# Altium PCB PCB.PcbDoc
Units mm, origin at the board's own origin, x right, y up, seen from the top; angles counter-clockwise.
Board outline 152.4 x 101.6 mm, 4 copper layers (Top Layer, (GND), (PWR), Bottom Layer), stack 1.369 mm thick; 143 components, 82 nets, 431 pads, 1 vias.
Unrouted connection lines stored in the file: 245.
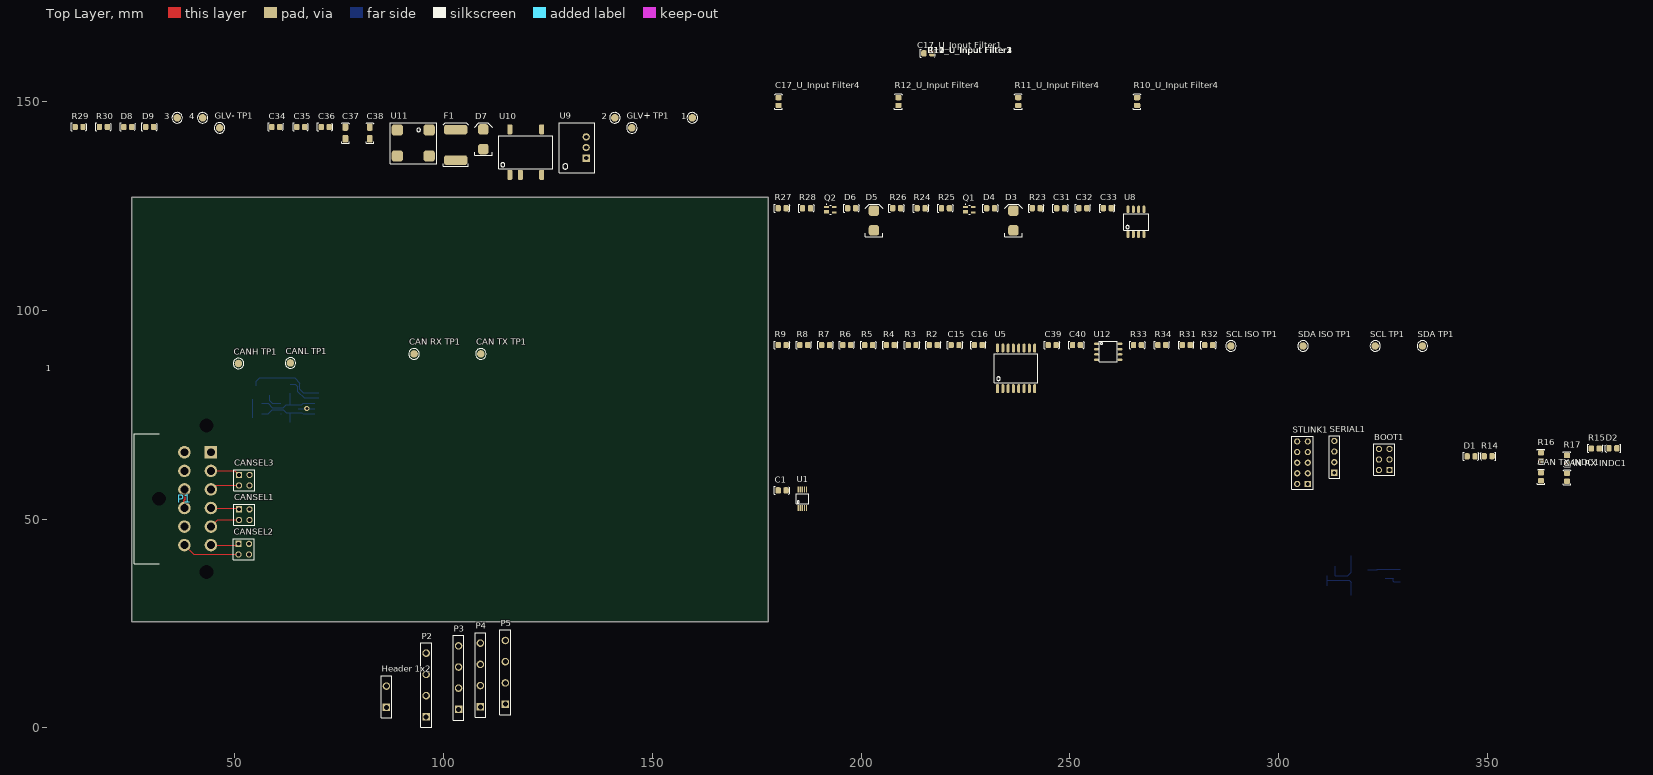
[diagram p0: Top Layer view]
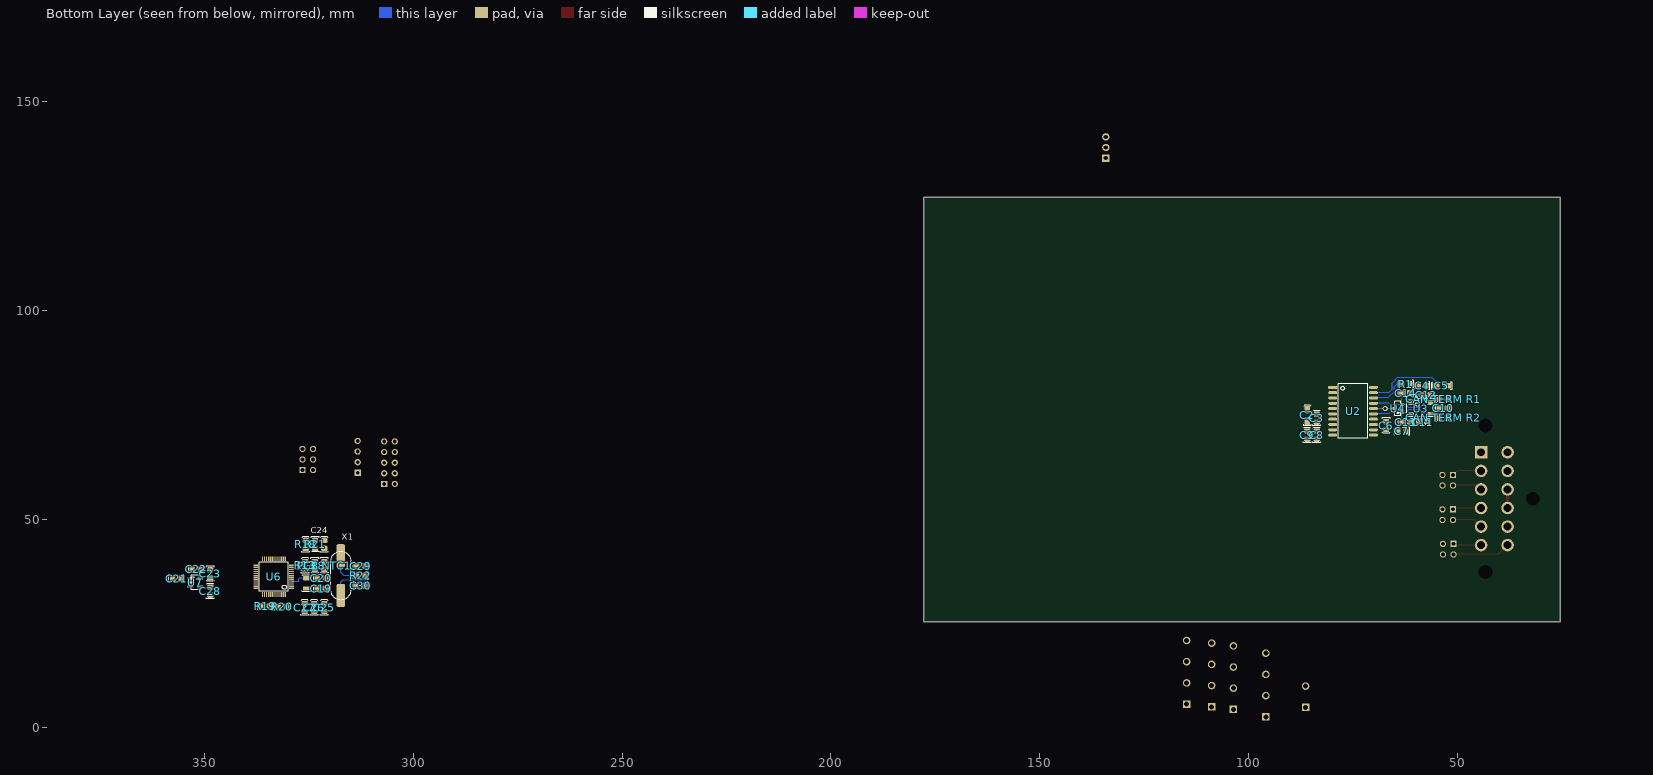
[diagram p1: Bottom Layer view, seen from below]
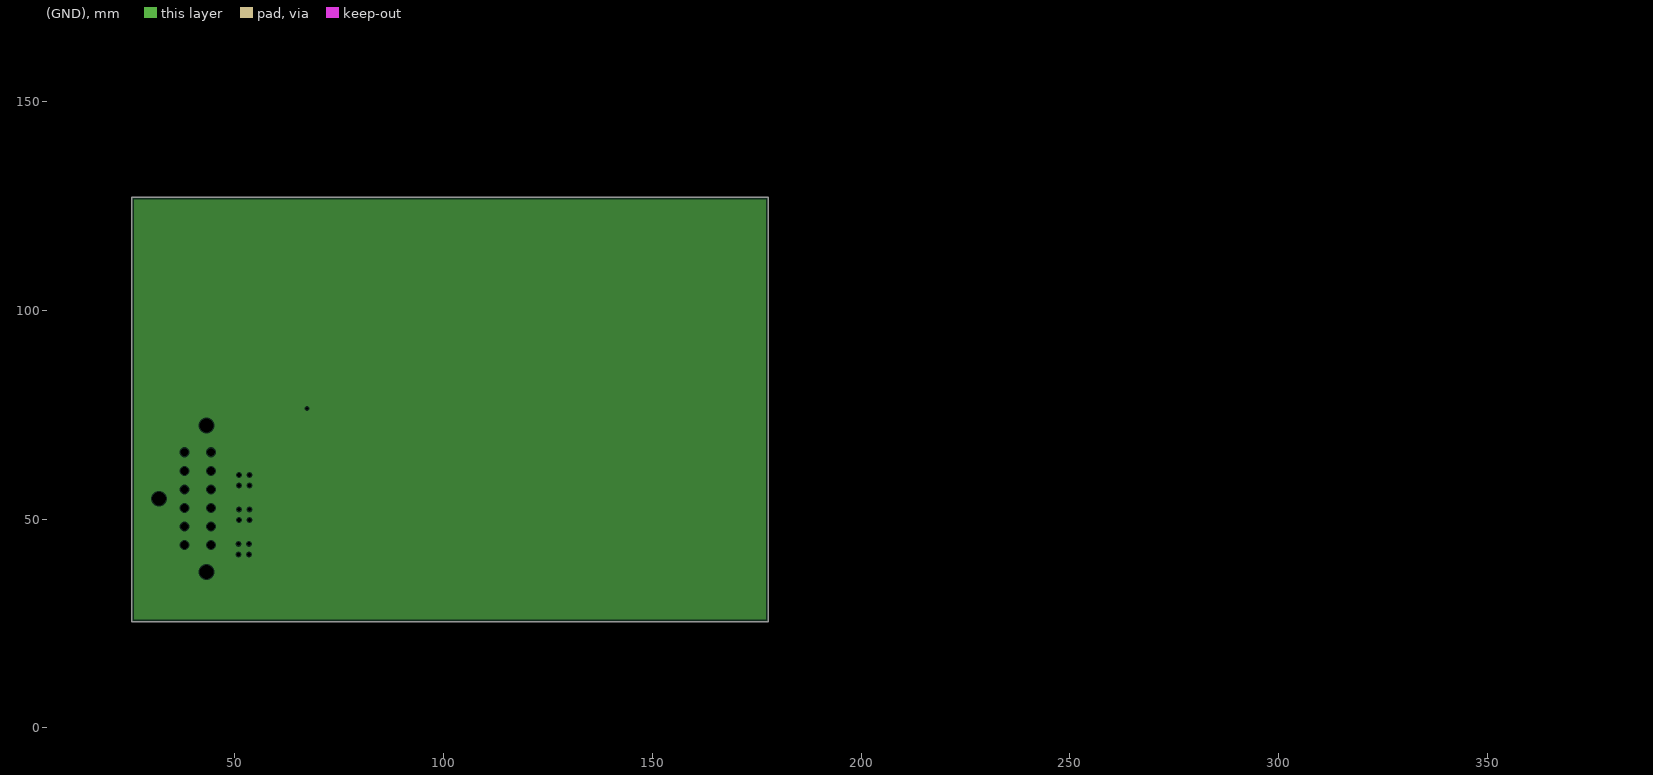
[diagram p2: (GND), clearances drawn from the general rule]
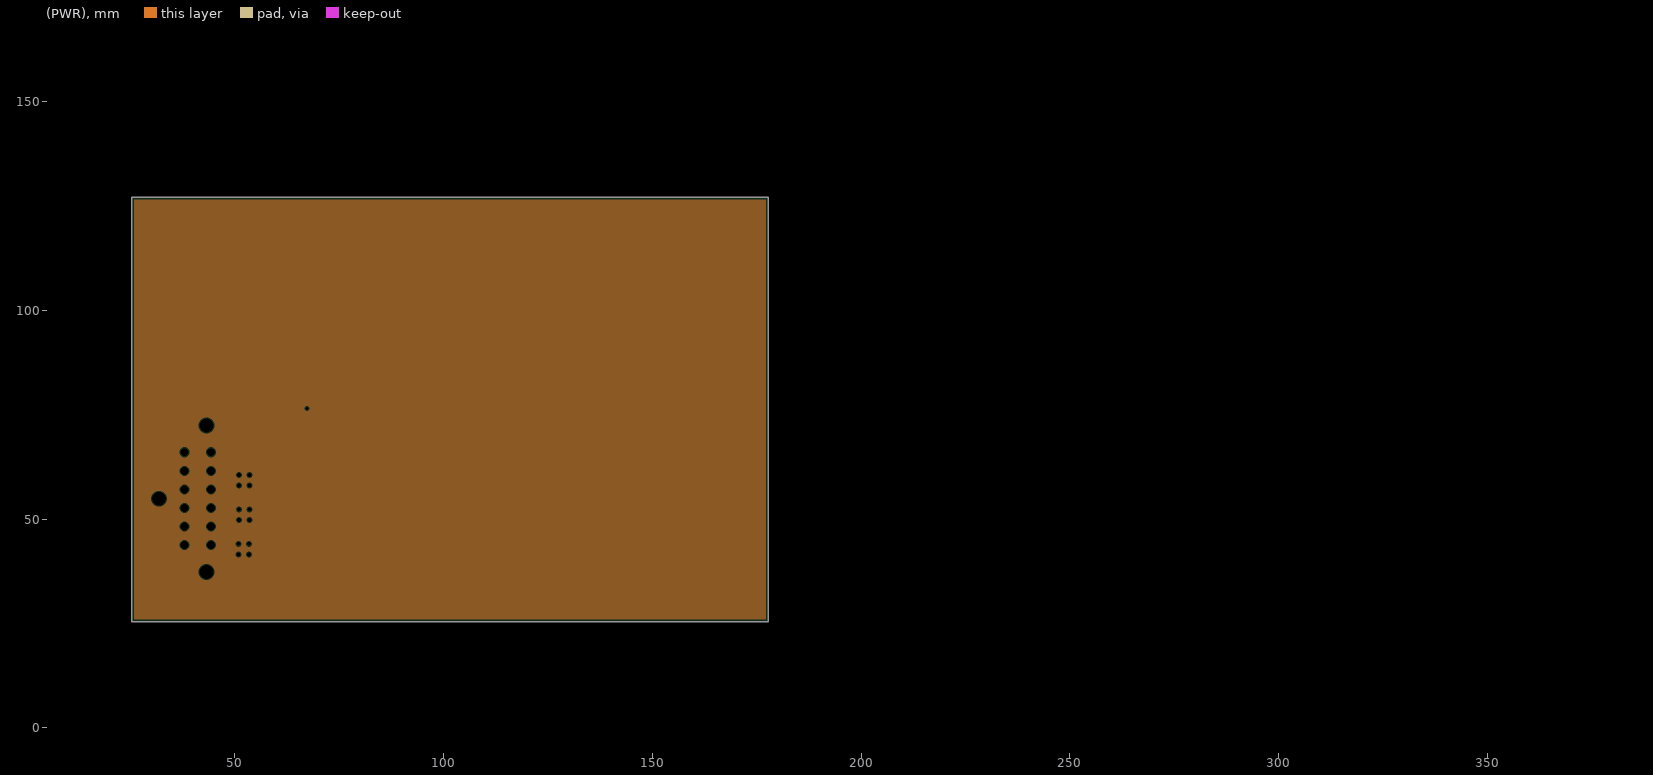
[diagram p3: (PWR), clearances drawn from the general rule]

## Layer stack, top to bottom
Top Solder: solder mask 0.0254, SM-001, Dk 4
Top Layer: signal copper 0.035
Dielectric 1: prepreg 0.1295, PP-017, Dk 4.3
Dielectric 2: prepreg 0.1295, PP-017, Dk 4.3
(GND): plane copper 0.035
Dielectric 3: core 0.7112, Core-039, Dk 4.8
(PWR): plane copper 0.035
Dielectric 4: prepreg 0.1295, PP-017, Dk 4.3
Dielectric 5: prepreg 0.1295, PP-017, Dk 4.3
Bottom Layer: signal copper 0.035
Bottom Solder: solder mask 0.0254, SM-001, Dk 4

## Board outline
25.4,25.4 177.8,25.4 177.8,127 25.4,127

## Design rules (kind name [scope] priority, off if disabled: settings)
Clearance [All] p1: gap=0.254 ignorepadtopadclearanceinfootprint=FALSE except(0: Arc-Hole Track-Hole SMDPad-Hole THPad-Hole Via-Hole Fill-Hole Poly-Hole Region-Hole Text-Hole; 0.1: THPad-THPad; 0.152: Arc-SMDPad Track-SMDPad SMDPad-SMDPad; 0.2: Arc-THPad Track-THPad SMDPad-THPad THPad-Via; 0.203: Arc-Arc Arc-Track Arc-Region Track-Track Track-Region SMDPad-Region THPad-Region Via-Region Fill-Region Poly-Region Region-Region; 0.6: Arc-Poly Track-Poly SMDPad-Poly THPad-Poly Via-Poly Fill-Poly Poly-Poly)
Clearance Clearance_CAN [InNet('CANL') or InNet('CANH')] p2: gap=0.5 ignorepadtopadclearanceinfootprint=FALSE except(0.1: Arc-THPad Arc-Hole Track-THPad Track-Hole SMDPad-THPad SMDPad-Hole THPad-THPad THPad-Hole Via-Hole Fill-Hole Poly-Hole Region-Hole Text-Hole; 0.152: Arc-SMDPad Track-SMDPad SMDPad-SMDPad; 0.2: THPad-Via; 0.203: Arc-Arc Arc-Track Track-Track; 0.254: Arc-Via Arc-Text Track-Via Track-Text SMDPad-Via SMDPad-Text THPad-Text Via-Via Via-Text Fill-Text Poly-Text Region-Text Text-Text) // DiffPair
DiffPairsRouting [InDifferentialPair('CANBUS')] p1: maxlimit=0.254 minlimit=0.254 mostfreqgap=0.254 toplayer_minwidth=0.381 toplayer_maxwidth=0.381 toplayer_prefwidth=0.381 bottomlayer_minwidth=0.381 bottomlayer_maxwidth=0.381 bottomlayer_prefwidth=0.381 maxuncoupledlength=12.7
Height [All] p1: minheight=0 maxheight=50 prefheight=12.7
HoleSize [All] p1: absolutevalues=TRUE maxlimit=10 minlimit=0.025 maxpercent=80.000 minpercent=20.000
MatchedLengths [All] p1: tolerance=25.4 checknetsindiffpair=FALSE checkdiffpairvsdiffpair=TRUE checkxsignals=TRUE checkothers=TRUE
PlaneClearance [All] p1: clearance=0.254
PlaneConnect [All] p1: pad.planeconnectstyle=Relief pad.reliefexpansion=0.508 pad.reliefentries=4 pad.reliefconductorwidth=0.8 pad.reliefairgap=0.254 via.planeconnectstyle=Direct via.reliefexpansion=0.508 via.reliefentries=4 via.reliefconductorwidth=0.8 via.reliefairgap=0.254
PolygonConnect [All] p1: thpad.connectstyle=Relief thpad.reliefconductorwidth=0.6 thpad.reliefentries=4 thpad.polygonreliefangle="90 Angle" thpad.airgapwidth=0.254 smdpad.connectstyle=Relief smdpad.reliefconductorwidth=0.6 smdpad.reliefentries=4 smdpad.polygonreliefangle="90 Angle" smdpad.airgapwidth=0.254 via.connectstyle=Direct via.reliefconductorwidth=0.6 via.reliefentries=4 via.polygonreliefangle="90 Angle" via.airgapwidth=0.254
RoutingVias [All] p1: holewidth=0.711 width=1.27 viastyle="Through Hole" minholewidth=0.203 minwidth=0.254 maxholewidth=0.711 maxwidth=1.27
SolderMaskExpansion [All] p1: expansion=0.051 istentingtop=FALSE
Width [All] p1: maxlimit=3 minlimit=0.127 preferedwidth=0.5
25 further rules are at their usual default settings.

## Classes and differential pairs
channel class "Input Filter": "U_Input Filter1" "U_Input Filter2" "U_Input Filter3" "U_Input Filter4"
component class "U_Power Supply": 1 2 3 4 C34 C35 C36 C37 C38 D7 D8 D9 F1 "GLV+ TP1" "GLV- TP1" R29 R30 U9 U10 U11
component class "U_Output Driver": C31 C32 C33 D3 D4 D5 D6 Q1 Q2 R23 R24 R25 R26 R27 R28 U8
component class U_Microcontroller: BOOT1 C18 C19 C20 C21 C22 C23 C24 C25 C26 C27 C28 C29 C30 "CAN RX INDC1" "CAN TX INDC1" D1 D2 "PCB NTC1" R13 R14 R15 R16 R17 R18 R19 R20 R21 R22 SERIAL1 STLINK1 U6 U7 X1 X2
component class "U_Input Filter4": "C17_U_Input Filter4" "R10_U_Input Filter4" "R11_U_Input Filter4" "R12_U_Input Filter4"
component class "U_Input Filter3": "C17_U_Input Filter3" "R10_U_Input Filter3" "R11_U_Input Filter3" "R12_U_Input Filter3"
component class "U_Input Filter2": "C17_U_Input Filter2" "R10_U_Input Filter2" "R11_U_Input Filter2" "R12_U_Input Filter2"
component class "U_Input Filter1": "C17_U_Input Filter1" "R10_U_Input Filter1" "R11_U_Input Filter1" "R12_U_Input Filter1"
component class "U_Digital Inputs": C15 C16 C39 C40 R2 R3 R4 R5 R6 R7 R8 R9 R31 R32 R33 R34 "SCL ISO TP1" "SCL TP1" "SDA ISO TP1" "SDA TP1" U5 U12
component class U_CAN: C2 C3 C4 C5 C6 C7 C8 C9 C10 C11 C12 C13 C14 "CAN RX TP1" "CAN TERM R1" "CAN TERM R2" "CAN TX TP1" "CANH TP1" "CANL TP1" R1 U2 U3 U4
component class "U_4 Channel ADC": C1 U1
component class "Top Level": CANSEL1 CANSEL2 CANSEL3 "Header 1x2" P1 P2 P3 P4 P5

## Components (designator, comment, footprint, x,y, rotation, side; value= is the part's Value field where it differs from the comment)
1 "0mm" "SMD Test Point" 159.585,146.076 r90 top
2 "0mm" "SMD Test Point" 141.043,146.076 r90 top
3 "0mm" "SMD Test Point" 36.268,146.076 r90 top
4 "0mm" "SMD Test Point" 42.364,146.076 r90 top
BOOT1 "2.54mm" "TH 2.54mm Header 2x3" 326.517,61.722 r90 top
C1 "100nF" 0805 181.102,56.896 r0 top
C2 "10nF" 1206 85.953,76.018 r90 bottom
C3 "100nF" 0805 83.714,74.168 r90 bottom
C4 "100nF" 0805 58.42,81.915 r0 bottom
C5 "10nF" 1206 54.991,81.915 r0 bottom
C6 "10uF" 0805 67.056,72.39 r270 bottom
C7 "100nF" 0805 63.324,70.993 r0 bottom
C8 "10uF" 0805 83.714,70.104 r90 bottom
C9 "100nF" 0805 86,70.104 r90 bottom
C10 "22pF" 0805 53.388,76.473 r0 bottom
C11 "100pF" 0805 58.371,73.146 r0 bottom
C12 "100pF" 0805 57.531,79.629 r0 bottom
C13 "100pF" 0805 62.34,73.146 r0 bottom
C14 "100pF" 0805 62.357,80.137 r0 bottom
C15 "100nF" 0805 222.504,91.694 r0 top
C16 "100nF" 0805 228.092,91.694 r0 top
"C17_U_Input Filter1" "100nF" 0805 216.014,161.531 r0 top (schematic designator C17)
"C17_U_Input Filter2" "100nF" 0805 216.014,161.531 r0 top (schematic designator C17)
"C17_U_Input Filter3" "100nF" 0805 216.014,161.531 r0 top (schematic designator C17)
"C17_U_Input Filter4" "100nF" 0805 180.213,149.987 r90 top (schematic designator C17)
C18 "100nF" 0805 323.557,38.864 r270 bottom
C19 "22pF" 0805 322.072,33.314 r0 bottom
C20 "22pF" 0805 322.072,35.814 r0 bottom
C21 "1uF" 0805 356.665,35.783 r180 bottom
C22 "100nF" 0805 351.917,37.973 r180 bottom
C23 "1uF" 0805 348.589,36.879 r270 bottom
C24 "1uF" 0805 321.31,43.942 r90 bottom
C25 "100nF" 0805 321.31,28.829 r90 bottom
C26 "100nF" 0805 323.723,28.829 r90 bottom
C27 "100nF" 0805 326.009,28.829 r90 bottom
C28 "22uF" 0805 348.615,32.766 r90 bottom
C29 "22pF" 0805 312.577,38.735 r0 bottom
C30 "22pF" 0805 312.528,34.036 r180 bottom
C31 "100nF" 0805 247.777,124.46 r0 top
C32 "100nF" 0805 253.111,124.46 r0 top
C33 "10uF" 0805 258.953,124.46 r0 top
C34 "10uF" 0805 59.89,143.917 r0 top
C35 "10uF" 0805 65.859,143.917 r0 top
C36 "10uF" 0805 71.701,143.917 r0 top
C37 "22uF" 1206 76.527,143.663 r90 top
C38 "22uF" 1206 82.369,143.663 r90 top
C39 "100nF" 0805 245.745,91.694 r0 top
C40 "100nF" 0805 251.587,91.694 r0 top
"CAN RX INDC1" "Blue" "0805 LED" 369.002,60.025 r90 top
"CAN RX TP1" "0mm" "SMD Test Point" 92.964,89.535 r90 top
"CAN TERM R1" "56R" 0805 53.34,78.749 r180 bottom
"CAN TERM R2" "56R" 0805 53.388,74.177 r0 bottom
"CAN TX INDC1" "Blue" "0805 LED" 362.779,60.152 r90 top
"CAN TX TP1" "0mm" "SMD Test Point" 108.966,89.535 r90 top
"CANH TP1" "0mm" "SMD Test Point" 50.927,87.249 r90 top
"CANL TP1" "0mm" "SMD Test Point" 63.373,87.376 r90 top
CANSEL1 "2.54mm" "TH 2.54mm Header 2x2" 51.054,52.324 r270 top
CANSEL2 "2.54mm" "TH 2.54mm Header 2x2" 50.927,44.069 r270 top
CANSEL3 "2.54mm" "TH 2.54mm Header 2x2" 51.054,60.579 r270 top
D1 "Red" "0805 LED" 346.048,65.044 r0 top
D2 "Red" "0805 LED" 380.006,66.922 r180 top
D3 "SD560BTR" "SMB Diode" 236.474,119.38 r90 top
D4 "Orange" "0805 LED" 231.013,124.46 r0 top
D5 "SD560BTR" "SMB Diode" 203.073,119.38 r90 top
D6 "Orange" "0805 LED" 197.739,124.46 r0 top
D7 "SD560BTR" "SMB Diode" 109.547,138.837 r90 top
D8 "Red" "0805 LED" 24.457,143.917 r0 top
D9 "Red" "0805 LED" 29.664,143.917 r0 top
F1 "0ZCF0100AF2A" 2920 102.943,135.916 r90 top
"GLV+ TP1" "0mm" "SMD Test Point" 145.107,143.663 r90 top
"GLV- TP1" "0mm" "SMD Test Point" 46.428,143.663 r90 top
"Header 1x2" "2.54mm" "TH 5.08mm Header 1x2" 86.36,4.926 r90 top
P1 "DT13-12P" DT13-12P 37.977,65.999 r270 top
P2 "2.54mm" "TH 5.08mm Header 1x4" 95.885,2.64 r90 top
P3 "2.54mm" "TH 5.08mm Header 1x4" 103.632,4.418 r90 top
P4 "2.54mm" "TH 5.08mm Header 1x4" 108.839,5.053 r90 top
P5 "2.54mm" "TH 5.08mm Header 1x4" 114.808,5.688 r90 top
"PCB NTC1" "10K (NTC) (B25/85 3430K)" 0805 321.271,38.864 r270 bottom
Q1 "STD70N10F4" SOT-343_N 225.933,124.079 r0 top
Q2 "STD70N10F4" SOT-343_N 192.659,124.079 r0 top
R1 "0R" 0805 62.357,82.296 r0 bottom
R2 "10k" 0805 217.297,91.694 r0 top
R3 "10k" 0805 212.217,91.694 r0 top
R4 "10k" 0805 207.01,91.694 r0 top
R5 "10k" 0805 201.803,91.694 r0 top
R6 "10k" 0805 196.596,91.694 r0 top
R7 "10k" 0805 191.516,91.694 r0 top
R8 "10k" 0805 186.309,91.694 r0 top
R9 "10k" 0805 181.102,91.694 r0 top
"R10_U_Input Filter1" "10k" 0805 216.014,161.531 r0 top (schematic designator R10)
"R10_U_Input Filter2" "10k" 0805 216.014,161.531 r0 top (schematic designator R10)
"R10_U_Input Filter3" "10k" 0805 216.014,161.531 r0 top (schematic designator R10)
"R10_U_Input Filter4" "10k" 0805 266.065,149.987 r90 top (schematic designator R10)
"R11_U_Input Filter1" "1k" 0805 216.014,161.531 r0 top (schematic designator R11)
"R11_U_Input Filter2" "1k" 0805 216.014,161.531 r0 top (schematic designator R11)
"R11_U_Input Filter3" "1k" 0805 216.014,161.531 r0 top (schematic designator R11)
"R11_U_Input Filter4" "1k" 0805 237.617,149.987 r90 top (schematic designator R11)
"R12_U_Input Filter1" "10k" 0805 216.014,161.531 r0 top (schematic designator R12)
"R12_U_Input Filter2" "10k" 0805 216.014,161.531 r0 top (schematic designator R12)
"R12_U_Input Filter3" "10k" 0805 216.014,161.531 r0 top (schematic designator R12)
"R12_U_Input Filter4" "10k" 0805 208.915,149.987 r90 top (schematic designator R12)
R13 "10k" 0805 325.882,38.913 r90 bottom
R14 "510R" 0805 350.112,65.044 r180 top
R15 "510R" 0805 375.808,66.943 r0 top
R16 "680R" 0805 362.812,64.917 r270 top
R17 "680R" 0805 369.035,64.282 r270 top
R18 "10k" 0805 325.755,43.942 r90 bottom
R19 "5.1k" 0805 335.407,29.083 r0 bottom
R20 "5.1k" 0805 331.343,29.083 r180 bottom
R21 "10k" 0805 323.469,43.942 r270 bottom
R22 "10M" 0805 312.577,36.449 r0 bottom
R23 "1.5k" 0805 241.935,124.46 r0 top
R24 "10k" 0805 214.376,124.46 r0 top
R25 "20k" 0805 220.218,124.46 r0 top
R26 "1.5k" 0805 208.534,124.46 r0 top
R27 "10k" 0805 181.102,124.46 r0 top
R28 "20k" 0805 186.944,124.46 r0 top
R29 "680R" 0805 12.773,143.917 r0 top
R30 "510R" 0805 18.615,143.917 r0 top
R31 "3.3k" 0805 277.876,91.694 r0 top
R32 "3.3k" 0805 283.21,91.694 r0 top
R33 "3.3k" 0805 266.192,91.694 r0 top
R34 "3.3k" 0805 272.034,91.694 r0 top
"SCL ISO TP1" "0mm" "SMD Test Point" 288.544,91.44 r90 top
"SCL TP1" "0mm" "SMD Test Point" 323.088,91.44 r90 top
"SDA ISO TP1" "0mm" "SMD Test Point" 305.816,91.44 r90 top
"SDA TP1" "0mm" "SMD Test Point" 334.391,91.44 r90 top
SERIAL1 "2.54mm" "TH 2.54mm Header 1x4" 313.309,61.087 r90 top
STLINK1 "2.54mm" "TH 2.54mm Header 2x5" 306.959,58.42 r90 top
U1 "ADS1115" "TI 10-VSSOP" 185.928,54.864 r90 top
U2 "ADM3053" "AD SOIC-W 20" 74.98,75.819 r270 bottom
U3 "B82787C0104H002" "TDK 4-PC Pad" 61.087,77.713 r180 bottom
U4 "NUP2105L" "ON SOT-23" 64.262,76.463 r90 bottom
U5 "ADuM1400" "AD 16-SOIC" 238.379,86.106 r0 top
U6 "STM32F103C8T6" "STM 48-LQFP" 333.371,36.195 r90 bottom
U7 "RT9193-33GB" "RICHTEK SOT-23-5" 352.394,34.757 r270 bottom
U8 "ADUM3221ARZ" "AD 8-SOIC" 265.811,121.158 r0 top
U9 "R-78C5.0-1.0" "RECOM 3-SIP" 134.185,136.424 r90 top
U10 "R2S-0505/HP" "RECOM 8-SMD (5 Pin)" 119.707,137.821 r0 top
U11 "744272121" "Wurth 4-PC Pad" 88.973,136.932 r0 top
U12 "ISO1540DR" "TI 8-SOIC" 266.065,89.408 r0 top
X1 "8MHz" "Abracon HC-49/US" 317.346,36.46 r270 bottom
X2 "32.768kHz" "EPSON 2-SMD" 325.553,34.59 r90 bottom

## Footprints (in the part's own frame and the unit in brackets; to place one, negate y for a bottom-side part, rotate by r counter-clockwise, add the part's x,y. Pads: shape width x height; smd on the part's side, far side on the other; paste and mask are expansions set on the pad)
0805 [mm]
  rrect50% 1.3x1.5 smd: 1(-0.962,-0.026) 2(0.938,-0.026)
  silkscreen extent -1.85,-0.95 1.8,0.93, body extent -1,-0.65 1,0.66, height 0.73
"0805 LED" [mm]
  rrect50% 1.3x1.5 smd: A(-0.962,-0.026) K(0.938,-0.026)
  silkscreen extent -1.85,-0.95 1.8,0.93, body extent -1.1,-0.62 0.9,0.62, height 1
1206 [mm]
  rrect50% 1.8x1.4 smd: 1(-2.6,0) 2(0.2,0)
  silkscreen extent -3.7,-0.9 1.2,0.9, body extent -2.9,-0.9 0.5,0.9, height 1.85
2920 [mm]
  rrect50% 2.3x5.6 smd: 1(0,0) 2(7.3,0)
  silkscreen extent -1.4,-3 9,3, body extent -0.34,-2.81 7.64,2.81, height 1.14
"Abracon HC-49/US" [mm]
  rrect50% 5.6x2.1 smd: 1(-4.75,0) 2(4.75,0)
  silkscreen extent -5.85,-2.35 5.85,2.35, body extent -6.35,-2.35 6.35,2.35, height 4.06
"AD 8-SOIC" [mm]
  oval 0.7x1.8 smd: 1(-1.905,-3) 2(-0.635,-3) 3(0.635,-3) 4(1.905,-3) 5(1.905,3) 6(0.635,3) 7(-0.635,3) 8(-1.905,3)
  silkscreen extent -2.87,-2 3.05,2, body extent -2.5,-3.1 2.5,3.1, height 1.76
"AD 16-SOIC" [mil]
  rrect50% 28x85 smd: 1(-225,-192.02)
  oval 28x85 smd: 2(-175,-192.02) 3(-125,-192.02) 4(-75,-192.02) 5(-25,-192.02) 6(25,-192.02) 7(75,-192.02) 8(125,-192.02) 9(125,190) 10(75,189.96) 11(25,189.96) 12(-25,189.96) 13(-75,189.96) 14(-125,189.96) 15(-175,191.98) 16(-225,191.98)
  silkscreen extent -257,-138 155,138, body extent -256,-209 156,209, height 104
"AD SOIC-W 20" [mil]
  rrect50% 28x85 smd: 1(-225,-192.02)
  oval 28x85 smd: 2(-175,-192.02) 3(-125,-192.02) 4(-75,-192.02) 5(-25,-192.02) 6(25,-192.02) 7(75,-192.02) 8(125,-192.02) 9(175,-192.02) 10(225,-192.02) 11(225,192.02) 12(175,191.98) 13(125,191.98) 14(75,191.98) 15(25,191.98) 16(-25,191.98) 17(-75,191.98) 18(-125,191.98) 19(-175,191.98) 20(-225,191.98)
  silkscreen extent -257,-138 256,138, body extent -260,-210 260,210, height 105
DT13-12P [mm]
  round 3 hole 3.3 unplated: 0(-6.405,5.33) 0(11.135,-6.1) 0(28.675,5.33)
  rect 3x3 hole 1.9: 1(0,6.35)
  round 3 hole 1.9: 2(4.45,6.35) 3(8.9,6.35) 4(13.35,6.35) 5(17.8,6.35) 6(22.25,6.35) 7(22.25,0) 8(17.8,0) 9(13.35,0) 10(8.9,0) 11(4.45,0) 12(0,0)
  silkscreen extent -4.45,-12 26.7,-6, body extent -18.6,-34.7 40.6,9.5, height 37.63
"EPSON 2-SMD" [mm]
  rrect50% 1x1.8 smd: 1(-1.25,0) 2(1.25,0)
  silkscreen extent -2,-1.2 2,1.2, body extent -1.5,-1 1.5,1, height 1
"ON SOT-23" [mm] "NUP2105L"
  rrect50% 0.8x0.9 smd: 1(-0.95,-1) 2(0.95,-1) 3(0,1)
  silkscreen extent -1.75,-0.65 1.75,0.75, body extent -1.5,-1.28 1.5,1.27, height 1
"RECOM 3-SIP" [mm] "12 to 42 Vdc In, 9 Vdc Out"
  rect 1.75x1.75 hole 1: 1(0,0)
  round 1.75 hole 1: 2(2.54,0) 3(5.08,0)
  silkscreen extent -3.5,-2 8.5,6.5, body extent -3.26,-2.02 8.34,6.48, height 11.41
"RECOM 8-SMD (5 Pin)" [mm]
  rrect50% 1.2x2.4 smd: 1(-3.81,-5.4) 2(-1.27,-5.4) 4(3.81,-5.4) 5(3.81,5.5) 8(-3.81,5.5)
  silkscreen extent -6.5,-4 6.5,4, body extent -6.37,-5.55 6.38,5.55, height 9.2
"RICHTEK SOT-23-5" [mil]
  rrect50% 19x58 smd: 1(-39.37,-39.37) 2(-1.97,-39.37) 3(35.43,-39.37) 4(35.43,53.63) 5(-39.37,53.63)
  silkscreen extent -69,-31 64,46, body extent -62,-51 58,67, height 57
"SMB Diode" [mm]
  rrect50% 2.5x2.5 smd: A(-0.25,0) K(4.45,0)
  silkscreen extent -1.75,-2.1 6,2.1, body extent -0.69,-1.97 4.9,1.97, height 2.5
"SMD Test Point" [mm]
  round 1.8 smd: 1(0,0)
  silkscreen extent -1.27,-1.27 1.27,1.27
SOT-343_N [mm] "SOT343, 4-Leads, Body 2x1.3 mm, Pitch 1.3mm, Lead Span 2.1mm, IPC Medium Density"
  rect 1.15x0.5 smd: 1(-0.925,0.65) 3(0.925,-0.65) 4(0.925,0.65)
  rect 1.15x0.8 smd: 2(-0.925,-0.5)
  silkscreen extent -0.97,-1.1 0.2,1.35, body extent -0.7,-1.1 0.7,1.1, height 1
"STM 48-LQFP" [mm]
  rrect50% 0.3x1.2 smd mask+0.05: 1(-2.75,-4.25) 2(-2.25,-4.25) 3(-1.75,-4.25) 4(-1.25,-4.25) 5(-0.75,-4.25) 6(-0.25,-4.25) 7(0.25,-4.25) 8(0.75,-4.25) 9(1.25,-4.25) 10(1.75,-4.25) 11(2.25,-4.25) 12(2.75,-4.25) 25(2.75,4.25) 26(2.25,4.25) 27(1.75,4.25) 28(1.25,4.25) 29(0.75,4.25) 30(0.25,4.25) 31(-0.25,4.25) 32(-0.75,4.25) 33(-1.25,4.25) 34(-1.75,4.25) 35(-2.25,4.25) 36(-2.75,4.25)
  rrect50% 1.2x0.3 smd mask+0.05: 13(4.25,-2.75) 14(4.25,-2.25) 15(4.25,-1.75) 16(4.25,-1.25) 17(4.25,-0.75) 18(4.25,-0.25) 19(4.25,0.25) 20(4.25,0.75) 21(4.25,1.25) 22(4.25,1.75) 23(4.25,2.25) 24(4.25,2.75) 37(-4.25,2.75) 38(-4.25,2.25) 39(-4.25,1.75) 40(-4.25,1.25) 41(-4.25,0.75) 42(-4.25,0.25) 43(-4.25,-0.25) 44(-4.25,-0.75) 45(-4.25,-1.25) 46(-4.25,-1.75) 47(-4.25,-2.25) 48(-4.25,-2.75)
  silkscreen extent -3.5,-3.5 3.5,3.5, body extent -4.6,-4.6 4.6,4.6, height 1.6
"TDK 4-PC Pad" [mm]
  rrect50% 1.35x0.9 smd: 1(0,0) 2(0,-2.5) 3(4.55,-2.5) 4(4.55,0)
  silkscreen extent -1,-3.2 5.5,0.7, body extent -0.02,-2.82 4.48,0.38, height 2.8
"TH 2.54mm Header 1x4" [mm]
  rect 1.5x1.5 hole 0.9: 1(0,0)
  round 1.5 hole 0.9: 2(2.54,0) 3(5.08,0) 4(7.62,0)
  silkscreen extent -1.27,-1.27 8.89,1.27
"TH 2.54mm Header 2x2" [mm]
  rect 1.5x1.5 hole 0.9: 1(0,0)
  round 1.5 hole 0.9: 2(0,2.54) 3(2.54,0) 4(2.54,2.54)
  silkscreen extent -1.27,-1.27 3.81,3.81
"TH 2.54mm Header 2x3" [mm]
  rect 1.5x1.5 hole 0.9: 1(0,0)
  round 1.5 hole 0.9: 2(0,2.54) 3(2.54,0) 4(2.54,2.54) 5(5.08,0) 6(5.08,2.54)
  silkscreen extent -1.27,-1.27 6.35,3.81
"TH 2.54mm Header 2x5" [mm]
  rect 1.5x1.5 hole 0.9: 1(0,0)
  round 1.5 hole 0.9: 2(0,2.54) 3(2.54,0) 4(2.54,2.54) 5(5.08,0) 6(5.08,2.54) 7(7.62,0) 8(7.62,2.54) 9(10.16,0) 10(10.16,2.54)
  silkscreen extent -1.27,-1.27 11.43,3.81
"TH 5.08mm Header 1x2" [mm]
  rect 1.8x1.8 hole 1.2: 1(0,0)
  round 1.8 hole 1.2: 2(5.08,0)
  silkscreen extent -2.54,-1.27 7.62,1.27
"TH 5.08mm Header 1x4" [mm]
  rect 1.8x1.8 hole 1.2: 1(0,0)
  round 1.5 hole 0.9: 2(5.08,0)
  round 1.8 hole 1.2: 2(5.08,0) 3(10.16,0) 4(15.24,0)
  silkscreen extent -2.54,-1.27 17.78,1.27
"TI 8-SOIC" [mm]
  oval 1.2x0.6 smd: 1(-9.677,2.54) 2(-9.677,1.27) 3(-9.677,0) 4(-9.677,-1.27) 5(-4.089,-1.27) 6(-4.089,0) 7(-4.089,1.27) 8(-4.089,2.54)
  silkscreen extent -9,-1.78 -4.75,3.17, body extent -9.96,-1.87 -3.76,3.14, height 1.76
"TI 10-VSSOP" [mm]
  rrect50% 1.45x0.3 smd mask+0.05: 1(-2.2,1) 2(-2.2,0.5) 3(-2.2,0) 4(-2.2,-0.5) 5(-2.2,-1) 6(2.2,-1) 7(2.2,-0.5) 8(2.2,0) 9(2.2,0.5) 10(2.2,1)
  silkscreen extent -1.25,-1.5 1.25,1.5, body extent -2.45,-1.5 2.45,1.5, height 1.12
"Wurth 4-PC Pad" [mm]
  rrect50% 2.7x2.7 smd: 1(7.62,6.22) 2(0,6.22) 3(0,0) 4(7.62,0)
  silkscreen extent -1.7,-1.8 9.4,8, body extent -1.19,-1.24 8.81,7.46, height 6.2

## Part data
1 2 3 4 "CAN RX TP1" "CAN TX TP1" "CANH TP1" "CANL TP1" "GLV+ TP1" "GLV- TP1" "SCL ISO TP1" "SCL TP1" "SDA ISO TP1" "SDA TP1": library part "SMD Test Point", Angle=0, Contact=NA, Flange=No, Part Number="SMD Test Point", Pitch=0mm, Positions=1, Row Spacing=0
BOOT1: library part "TH 2.54mm Header 2x3", Angle=0, Contact=NA, Flange=No, Part Number="TH 2.54mm Header 2x3", Pitch=2.54mm, Positions=6, Row Spacing=2.54mm
C1 C3 C4 C7 C9 C15 C16 "C17_U_Input Filter1" "C17_U_Input Filter2" "C17_U_Input Filter3" "C17_U_Input Filter4" C18 C22 C25 C26 C27 C31 C32 C39 C40: library part GCM21BR71E104KA37L, Manufacturer=muRata, Rated Voltage=25V, Tolerance=10%, Material=X7R, Part Number=GCM21BR71E104KA37L
C2 C5: library part GCM3195C2A103JA16D, Digikey Part Number=490-4978-2-ND, Manufacturer=muRata, Rated Voltage=100V, Tolerance=5%, Material=Ceramic, Part Number=GCM3195C2A103JA16D
C6 C8 C33 C34 C35 C36: library part GRM21BR6YA106KE43L, Digikey Part Number=490-10514-6-ND, Manufacturer=muRata, Rated Voltage=50V, Tolerance=10%, Material=X5R, Part Number=GRM21BR6YA106KE43L
C10 C19 C20 C29 C30: library part GCM21B5C1H220JA37L, Manufacturer=muRata, Rated Voltage=50V, Tolerance=5%, Material=C0G, Part Number=GCM21B5C1H220JA37L
C11 C12 C13 C14: library part GCM21B5C1H101JA37L, Manufacturer=muRata, Rated Voltage=50V, Tolerance=5%, Material=C0G, Part Number=GCM21B5C1H101JA37L
C21 C23 C24: library part AC0805KKX7R8BB105, Manufacturer=YAGEO, Rated Voltage=25V, Tolerance=10%, Material=X7R, Part Number=AC0805KKX7R8BB105
C28: library part GRM21BR61A226ME51L, Digikey Part Number=490-10511-1-ND, Manufacturer=muRata, Rated Voltage=10V, Tolerance=20%, Material=X5R, Part Number=GRM21BR61A226ME51L
C37 C38: library part CC1206MKX5R7BB226, Digikey Part Number=311-1997-2-ND, Manufacturer=YAGEO, Rated Voltage=16V, Tolerance=20%, Material=Ceramic, Part Number=CC1206MKX5R7BB226
"CAN RX INDC1" "CAN TX INDC1": library part SML-MN2BCTT86C, "LED BLUE CLEAR 2012 SMD", Digikey Part Number=846-1207-1-ND, Manufacturer="ROHM Semiconductor", Colour=Blue, Digikey Link=https://www.digikey.com/product-detail/en/rohm-semiconductor/SMLMN2BCTT86C/846-1207-1-ND/6057239, Part Number=SML-MN2BCTT86C
"CAN TERM R1" "CAN TERM R2": library part RC0805FR0756RL, Digikey Part Number=311-56.0CRCT-ND, Manufacturer=YAGEO, Rated Voltage=0.125W, Tolerance=0.01, Material=FR-07, Part Number=RC0805FR0756RL
CANSEL1 CANSEL2 CANSEL3: library part "TH 2.54mm Header 2x2", Angle=0, Contact=NA, Flange=No, Part Number="TH 2.54mm Header 2x2", Pitch=2.54mm, Positions=4, Row Spacing=2.54mm
D1 D2 D8 D9: library part SML-210LTT86, "Red LED Indication - Discrete 1.75V 0805 (2012 Metric)", Digikey Part Number=511-1286-1-ND, Manufacturer="ROHM Semiconductor", Colour=Red, Digikey Link=https://www.digikey.com/product-detail/en/rohm-semiconductor/SML-210LTT86/511-1286-1-ND/637099, Part Number=SML-210LTT86
D3 D5 D7: "1.2V_F 600V 5A SMB", Digikey Part Number=1655-1530-2-ND, Manufacturer="SMC Diode Solutions", Digikey Link=https://www.digikey.com/product-detail/en/smc-diode-solutions/SD560BTR/1655-1530-2-ND/6022620, Part Number=SD560BTR
D4 D6: library part SML-211DTT86, "Orange LED Indication - Discrete 1.75V 0805 (2012 Metric)", Digikey Part Number=511-1291-1-ND, Manufacturer="ROHM Semiconductor", Colour=Orange, Digikey Link=https://www.digikey.com/product-detail/en/rohm-semiconductor/SML-211DTT86/511-1291-1-ND/637104, Part Number=SML-211DTT86
F1: "PTC RESET FUSE 60V 1A 292", Digikey Part Number=507-2070-1-ND, Manufacturer="Littelfuse Inc.", Digikey Link=https://www.digikey.com/product-detail/en/bel-fuse-inc/0ZCF0100AF2A/507-2070-1-ND/6210547, Part Number=0ZCF0100AF2A
"Header 1x2": library part "TH 5.08mm Header 1x2", Angle=0, Contact=NA, Flange=No, Part Number="TH 5.08mm Header 1x2", Pitch=2.54mm, Positions=2, Row Spacing=5.08mm
P1: Digikey Part Number=1734-1451-ND, Angle=90, Contact=Nickel, Digikey Link=https://www.digikey.com.au/product-detail/en/te-connectivity-deutsch-connectors/DT13-12PA/1734-1451-ND/7220123, Flange=Yes, Part Number=DT13-12P, Pitch=4.44mm, Positions=12, Row Spacing=6.35mm
P2 P3 P4 P5: library part "TH 5.08mm Header 1x4", Angle=0, Contact=NA, Flange=No, Part Number="TH 5.08mm Header 1x4", Pitch=2.54mm, Positions=4, Row Spacing=5.08mm
"PCB NTC1": library part NTCS0805E3103FLT, Digikey Part Number=BC2733CT-ND, Manufacturer="Vishay Beyschlag", Rated Voltage=210mW, Tolerance=0.01, Part Number=NTCS0805E3103FLT
Q1 Q2: "N-Channel 100V 60A (Tc) 125W (Tc) Surface Mount DPAK", Digikey Part Number=497-8806-2-ND, Manufacturer=STMicroelectronics, Digikey Link=https://www.digikey.com/product-detail/en/stmicroelectronics/STD70N10F4/497-8806-2-ND/2035599, LatestRevisionDate=29-May-2009, LatestRevisionNote="IPC-7351 Footprint Added.", PackageDescription="4-Pin SOT-343 Package 1.3 mm Pitch, 2.1 mm Lead Span", PackageReference=SOT-343, PackageVersion=Sep-2000, Part Number=STD70N10F4, Published=24-Mar-1999, Publisher="Altium Limited"
R1: library part RC0805FR070RL, Digikey Part Number=311-0.0CRCT-ND, Manufacturer=YAGEO, Rated Voltage=0.125W, Tolerance=0.01, Material=FR-07, Part Number=RC0805FR070RL
R2 R3 R4 R5 R6 R7 R8 R9 "R10_U_Input Filter1" "R10_U_Input Filter2" "R10_U_Input Filter3" "R10_U_Input Filter4" "R12_U_Input Filter1" "R12_U_Input Filter2" "R12_U_Input Filter3" "R12_U_Input Filter4" R13 R18 R21 R24 R27: library part RC0805FR0710KL, Digikey Part Number=311-10.0KCRCT-ND, Manufacturer=YAGEO, Rated Voltage=0.125W, Tolerance=0.01, Material=FR-07, Part Number=RC0805FR0710KL
"R11_U_Input Filter1" "R11_U_Input Filter2" "R11_U_Input Filter3" "R11_U_Input Filter4": library part RC0805FR071KL, Digikey Part Number=311-1.00KCRCT-ND, Manufacturer=YAGEO, Rated Voltage=0.125W, Tolerance=0.01, Material=FR-07, Part Number=RC0805FR071KL
R14 R15 R30: library part RC0805FR07510RL, Digikey Part Number=311-510CRCT-ND, Manufacturer=YAGEO, Rated Voltage=0.125W, Tolerance=0.01, Material=FR-07, Part Number=RC0805FR07510RL
R16 R17 R29: library part RC0805FR07680RL, Digikey Part Number=311-680CRCT-ND, Manufacturer=YAGEO, Rated Voltage=0.125W, Tolerance=0.01, Material=FR-07, Part Number=RC0805FR07680RL
R19 R20: library part RC0805FR075K1L, Digikey Part Number=311-5.10KCRCT-ND, Manufacturer=YAGEO, Rated Voltage=0.125W, Tolerance=0.01, Material=FR-07, Part Number=RC0805FR075K1L
R22: library part RC0805FR0710ML, Digikey Part Number=311-10.0MCRCT-ND, Manufacturer=YAGEO, Rated Voltage=0.125W, Tolerance=0.01, Material=FR-07, Part Number=RC0805FR0710ML
R23 R26: library part RC0805FR071K5L, Digikey Part Number=311-1.50KCRCT-ND, Manufacturer=YAGEO, Rated Voltage=0.125W, Tolerance=0.01, Material=FR-07, Part Number=RC0805FR071K5L
R25 R28: library part RC0805FR0720KL, Digikey Part Number=311-20.0KCRCT-ND, Manufacturer=YAGEO, Rated Voltage=0.125W, Tolerance=0.01, Material=FR-07, Part Number=RC0805FR0720KL
R31 R32 R33 R34: library part RC0805FR073K3L, Digikey Part Number=311-3.30KCRCT-ND, Manufacturer=YAGEO, Rated Voltage=0.125W, Tolerance=0.01, Material=FR-07, Part Number=RC0805FR073K3L
SERIAL1: library part "TH 2.54mm Header 1x4", Angle=0, Contact=NA, Flange=No, Part Number="TH 2.54mm Header 1x4", Pitch=2.54mm, Positions=4, Row Spacing=2.54mm
STLINK1: library part "TH 2.54mm Header 2x5", Angle=0, Contact=NA, Flange=No, Part Number="TH 2.54mm Header 2x5", Pitch=2.54mm, Positions=10, Row Spacing=2.54mm
U1: "16 Bit Analog to Digital Converter 2, 4 Input 1 Sigma-Delta 10-VSSOP", Digikey Part Number=296-38849-1-ND, Manufacturer="Texas Instruments", Digikey Link=https://www.digikey.com/product-detail/en/texas-instruments/ADS1115IDGSR/296-38849-1-ND/5142969, Part Number=ADS1115
U2: "Isolated CAN Transceiver", Digikey Part Number=ADM3053BRWZ-ND, Manufacturer="Analogue Devices", Digikey Link=https://www.digikey.com/product-detail/en/analog-devices-inc/ADM3053BRWZ/ADM3053BRWZ-ND/2709332, Part Number=ADM3053
U3: "100µH @ 100kHz 2 Line Common Mode Choke Surface Mount 5.8 kOhms @ 10MHz 150mA DCR 2Ohm", Digikey Part Number=495-4598-1-ND, Inductance="100µH @ 100kHz", Manufacturer="EPCOS (TDK)", Rated Current=150mA, Digikey Link=https://www.digikey.com/product-detail/en/epcos-tdk/B82787C0104H002/495-4598-2-ND/3680998, Impedence="5.8 kOhms @ 10MHz", Material=Wirewound, Part Number=B82787C0104H002
U4: "Dual Line CAN Bus Protector", Digikey Part Number=NUP2105LT1GOSCT-ND, Manufacturer="ON Semiconductor", Digikey Link=https://www.digikey.com/product-detail/en/on-semiconductor/NUP2105LT1G/NUP2105LT1GOSCT-ND/1485001, Part Number=NUP2105L
U5: "General Purpose Digital Isolator 2500Vrms 4 Channel 1Mbps 25kV/µs CMTI 16-SOIC (0.295\", 7.50mm Width)", Digikey Part Number=ADUM1400WSRWZ-ND, Manufacturer="Analog Devices", Digikey Link=https://www.digikey.com/product-detail/en/analog-devices-inc/ADUM1400WSRWZ/ADUM1400WSRWZ-ND/1873713, Part Number=ADuM1400
U6: "ARM® Cortex®-M3 STM32F1 Microcontroller IC 32-Bit 72MHz 64KB (64K x 8) FLASH", Digikey Part Number=497-6063-ND, Manufacturer=STMicroelectronics, Digikey Link=https://www.digikey.com/product-detail/en/stmicroelectronics/STM32F103C8T6/497-6063-ND/1646338, Part Number=STM32F103C8T6
U7: "IC REG LINEAR 3.3V 300MA SOT23-5", Digikey Part Number=1028-1014-1-ND, Manufacturer=Richtek, Digikey Link=https://www.digikey.com/products/en?keywords=1028-1014-1-ND, Part Number=RT9193-33GB
U8: "4A Gate Driver Magnetic Coupling 2500Vrms 2 Channel 8-SOIC", Digikey Part Number=ADUM3221ARZ-ND, Manufacturer="Analog Devices", Digikey Link=https://www.digikey.com/product-detail/en/analog-devices-inc/ADUM3221ARZ/ADUM3221ARZ-ND/2616333, Part Number=ADUM3221ARZ
U9: "CONV DC/DC 1A 5V OUT SIP VERT", Digikey Part Number=945-1395-5-ND, Manufacturer=Recom, Digikey Link=https://www.digikey.com.au/product-detail/en/recom-power/R-78C5.0-1.0/945-1395-5-ND/2652148, Isolation=Non-Isolated, Part Number=R-78C5.0-1.0
U10: "Isolated Module DC DC Converter 1 Output 3.3V 606mA 4.5V - 5.5V Input", Digikey Part Number=945-1764-5-ND, Input Voltage=4.5V-5.5V, Manufacturer=Recom, Output Power=2W, Output Voltage=5V, Digikey Link=https://www.digikey.com/product-detail/en/recom-power/R2S-0505-HP/945-1764-5-ND/2302761, Efficiency=0.85, Isolation=Isolated, Part Number=R2S-0505/HP
U11: "120µH @ 100kHz 2 Line Common Mode Choke Surface Mount 460 Ohms @ 30MHz 2.5A DCR 25mOhm", Digikey Part Number=732-1489-1-ND, Inductance="120uH @ 100kHz", Manufacturer="Wurth Electronics Inc", Rated Current=2.5A, Digikey Link=https://www.digikey.com/product-detail/en/w-rth-elektronik/744272121/732-1489-1-ND/1639501, Impedence="460 Ohms @ 30MHz", Material=Wirewound, Part Number=744272121
U12: "I2C Digital Isolator (Multichannel)", Digikey Part Number=296-34871-1-ND, Manufacturer="Texas Instruments", Digikey Link=https://www.digikey.com/product-detail/en/texas-instruments/ISO1540DR/296-34871-1-ND/3587214, Part Number=ISO1540DR
X1: library part ABLS-8.000MHZ-B4-T, Digikey Part Number=535-10212-2-ND, Load Capacitance=18pF, Manufacturer="Abracon LLC", Digikey Link=https://www.digikey.com/product-detail/en/abracon-llc/ABLS-8.000MHZ-B4-T/535-10212-2-ND/2184155, ESR=80R, Part Number=ABLS-8.000MHZ-B4-T
X2: library part "FC-135 32.7680KA-A5", Digikey Part Number=SER4103TR-ND, Load Capacitance=12.5pF, Manufacturer=EPSON, Digikey Link=https://www.digikey.com/product-detail/en/epson/FC-135-32.7680KA-A5/SER4103TR-ND/5259895, ESR=70k, Part Number="FC-135 32.7680KA-A5"

## Via types
v1: diameter 1.27, hole 0.711, Top Layer to Bottom Layer, 1 vias

## Nets (pads, with @x,y where several pads share a name; then routed paths per layer and width w, separated by ;. In a path a pad name is that pad's centre, name@x,y a point inside that pad or via, vN(x,y) a via of type N, cw(c..) or ccw(c..) an arc to the next point about the centre after c; other vN are vias at no path point)
0V: P3.3 P3.4
"0V (ISO)": 4.1 "PCB NTC1.1" BOOT1.5 BOOT1.6 C2.1 C3.1 C8.1 C9.1 C16.1 C18.1 C19.1 C20.1 C21.1 C22.1 C23.1 C24.1 C25.1 C26.1 C27.1 C28.1 C29.1 C30.1 C31.1 C38.1 C40.1 R14.1 R16.1 R17.1 R24.1 R27.1 R30.1 SERIAL1.4 STLINK1.1 U2.1 U2.3 U2.7 U2.9 U2.10 U5.9 U5.15 U6.8 U6.23 U6.35 U6.47 U7.2 U8.4 U10.4 U12.4
"3.3V (ISO)": BOOT1.1 BOOT1.2 C22.2 C23.2 C24.2 C25.2 C26.2 C27.2 C40.2 D1.A D2.A R33.2 R34.2 SERIAL1.1 STLINK1.7 STLINK1.8 U6.1 U6.9 U6.24 U6.36 U6.48 U7.5 U12.1
5kW: P1.8
5V: 1.1 "R10_U_Input Filter1.2" "R10_U_Input Filter2.2" "R10_U_Input Filter3.2" "R10_U_Input Filter4.2" C1.2 C15.2 C32.2 C33.2 C37.2 C39.2 D8.A P3.1 P3.2 R2.2 R4.2 R6.2 R8.2 R31.2 R32.2 U1.1 U1.8 U5.1 U8.8 U9.3 U10.2 U12.8
"5V (ISO)": 2.1 C2.2 C3.2 C8.2 C9.2 C16.2 C21.2 C31.2 C38.2 D9.A R13.2 R19.2 R20.2 U2.6 U2.8 U5.10 U5.16 U7.1 U7.3 U8.1 U10.5
12V/24V: C36.2 U9.1 U11.2
BOOT0: BOOT1.3 R21.1
BOOT1: BOOT1.4 R18.2
CAN1H: CANSEL1.3 P1.5 | length 7.4
  Top Layer w0.254: P1.5 45.912,49.784 CANSEL1.3
CAN1L: CANSEL1.1 P1.4 | length 6.9
  Top Layer w0.254: P1.4 50.729,52.649 CANSEL1.1
CAN2H: CANSEL2.3 P1.7 | length 13.9
  Top Layer w0.254: P1.7 40.197,41.529 CANSEL2.3
CAN2L: CANSEL2.1 P1.6 | length 6.7
  Top Layer w0.254: P1.6 50.607,43.749 CANSEL2.1
CAN3H: CANSEL3.3 P1.3 | length 7.1
  Top Layer w0.254: P1.3 45.267,58.039 CANSEL3.3
CAN3L: CANSEL3.1 P1.2 | length 7.1
  Top Layer w0.254: P1.2 50.084,61.549 CANSEL3.1
"CAN RX INDC": "CAN RX INDC1.A" U6.19
"CAN TX INDC": "CAN TX INDC1.A" U6.18
CANH: "CAN TERM R1.2" C12.2 CANSEL1.4 CANSEL2.4 CANSEL3.4 U3.1 | length 4.2
  Bottom Layer w0.254: C12.2 58.469,78.31 59.066,77.713 U3.1
CANL: "CAN TERM R2.1" C11.2 CANSEL1.2 CANSEL2.2 CANSEL3.2 U3.2 | length 0.1
  Bottom Layer w0.254: U3.2 U3.2@61.136,75.164
CANS: C4.1 C5.1 C6.1 C7.1 C10.1 C11.1 C12.1 C13.1 C14.1 P1.1 R1.1 U2.11 U2.13 U2.16 U2.20 U4.3 | length 3.9
  Bottom Layer w0.254: U4.3 65.271,76.454 v1(67.31,76.454) 69.151,76.454 69.158,76.461 U2.16@69.165,76.454
"Digital 1": P5.1 R2.1 R3.2 U5.3
"Digital 2": P5.2 R4.1 R5.2 U5.4
"Digital 3": P5.3 R6.1 R7.2 U5.5
"Digital 4": P5.4 R8.1 R9.2 U5.6
"Driver 1": D3.A D4.K P2.2
"Driver 2": D5.A D6.K P2.4
GLV+: "Header 1x2.1" D3.K D5.K P1.12 P2.1 P2.3 R23.2 R26.2
GLV-: "GLV- TP1.1" "Header 1x2.2" C34.1 C35.1 P1.11 U11.4
"Green In": P1.9 P1.10 | length 4.4
  Top Layer w0.762: P1.9 P1.10
NetC4_2: C4.2 C5.2 C6.2 C7.2 U2.12 U2.19 | length 18.7
  Bottom Layer w0.254: C5.2 55.191,83.004 56.007,83.82 64.389,83.82 65.659,82.55 65.659,81.026 66.421,80.264 U2.19
NetC10_2: "CAN TERM R1.1" "CAN TERM R2.2" C10.2 | length 4.5
  Bottom Layer w0.254: 54.302,78.722 54.314,78.71 54.314,76.512 C10.2 54.326,74.203
NetC13_2: "CANL TP1.1" C13.2 U2.15 U3.3 U4.1 | length 15.8
  Bottom Layer w0.254: U3.3 58.068,75.213 59.055,76.2 61.632,76.2 62.319,75.513 U4.1 ; C13.2@63.294,73.156 C13.2 63.278,75.496 U4.1 ; U2.15@69.165,75.184 66.421,75.184 66.092,75.513 U4.1
NetC14_2: "CANH TP1.1" C14.2 U2.17 U3.4 U4.2 | length 16.2
  Bottom Layer w0.254: U3.4 58.072,77.713 59.077,76.708 61.614,76.708 62.319,77.413 U4.2 ; C14.2 63.278,80.147 63.278,77.429 U4.2 ; U2.17@69.165,77.724 66.421,77.724 66.11,77.413 U4.2
"NetC17_U_Input Filter1_2": "C17_U_Input Filter1.2" "R10_U_Input Filter1.1" "R11_U_Input Filter1.2" "R12_U_Input Filter1.2" U1.7
"NetC17_U_Input Filter2_2": "C17_U_Input Filter2.2" "R10_U_Input Filter2.1" "R11_U_Input Filter2.2" "R12_U_Input Filter2.2" U1.6
"NetC17_U_Input Filter3_2": "C17_U_Input Filter3.2" "R10_U_Input Filter3.1" "R11_U_Input Filter3.2" "R12_U_Input Filter3.2" U1.5
"NetC17_U_Input Filter4_2": "C17_U_Input Filter4.2" "R10_U_Input Filter4.1" "R11_U_Input Filter4.2" "R12_U_Input Filter4.2" U1.4
NetC28_2: C28.2 U7.4
NetC34_2: C34.2 C35.2 D7.K U11.1
"NetCAN RX INDC1_K": "CAN RX INDC1.K" R17.2
"NetCAN RX TP1_1": "CAN RX TP1.1" U2.4 U6.45
"NetCAN TX INDC1_K": "CAN TX INDC1.K" R16.2
"NetCAN TX TP1_1": "CAN TX TP1.1" U2.5 U6.46
NetD1_K: D1.K R14.2
NetD2_K: D2.K R15.2
NetD4_A: D4.A R23.1
NetD6_A: D6.A R26.1
NetD7_A: D7.A F1.2
NetD8_K: D8.K R29.2
NetD9_K: D9.K R30.2
NetQ1_G: R25.2 U8.7
NetQ2_G: R28.2 U8.6
NetR1_2: R1.2 U2.18 | length 8.9
  Bottom Layer w0.254: R1.2 64.49,82.322 65.151,81.661 65.151,80.518 66.675,78.994 U2.18
NetR18_1: R18.1 U6.20
NetR19_1: R19.1 R31.1 U6.42 U12.6
NetR20_1: "SDA TP1.1" R20.1 R32.1 U6.43 U12.7
NetR21_2: R21.2 U6.44
NetR24_2: R24.2 U6.27 U8.2
NetR27_2: R27.2 U6.28 U8.3
NetR33_1: "SCL ISO TP1.1" "SCL TP1.1" R33.1 U1.10 U12.3
NetR34_1: "SDA ISO TP1.1" R34.1 U1.9 U12.2
NetU5_11: U5.11 U6.26
NetU5_12: U5.12 U6.25
NetU5_13: U5.13 U6.22
NetU5_14: U5.14 U6.21
NRST: STLINK1.2 U6.7
PC13: R15.1 U6.2
"PCB TEMP": "PCB NTC1.2" C18.2 R13.1 U6.10 | length 7.8
  Bottom Layer w0.254: 321.298,37.926 C18.2 323.593,37.936 325.766,37.936 325.775,37.945 U6.10
"Sensor 1": "R11_U_Input Filter4.1" P4.1
"Sensor 2": "R11_U_Input Filter3.1" P4.2
"Sensor 3": "R11_U_Input Filter2.1" P4.3
"Sensor 4": "R11_U_Input Filter1.1" P4.4
SWCLK: STLINK1.3 U6.37
SWDIO: STLINK1.5 U6.34
"UART RX": SERIAL1.3 U6.31
"UART TX": SERIAL1.2 U6.30
USBDM: U6.32
USBDP: U6.33
XTALA: C29.2 R22.2 U6.5 X1.1 | length 10.4
  Bottom Layer w0.254: C29.2 R22.2 316.54,36.475 317.346,37.281 X1.1
XTALB: C30.2 R22.1 U6.6 X1.2 | length 11.5
  Bottom Layer w0.254: C30.2@311.615,34.01 311.615,35.304 ; R22.1 311.615,35.304 ; X1.2 317.346,34.855 316.897,35.304 311.615,35.304
XTALC: C19.2 U6.3 X2.1
XTALD: C20.2 U6.4 X2.2 | length 4.3
  Bottom Layer w0.203: X2.2 327.253,35.84 327.406,35.687 327.406,35.094 327.555,34.945 U6.4
pads on no net: 3.1 "C17_U_Input Filter1.1" "C17_U_Input Filter2.1" "C17_U_Input Filter3.1" "C17_U_Input Filter4.1" "GLV+ TP1.1" "R12_U_Input Filter1.1" "R12_U_Input Filter2.1" "R12_U_Input Filter3.1" "R12_U_Input Filter4.1" C1.1 C15.1 C32.1 C33.1 C36.1 C37.1 C39.1 F1.1 P1.0 Q1.1 Q1.2 Q1.3 Q1.4 Q2.1 Q2.2 Q2.3 Q2.4 R3.1 R5.1 R7.1 R9.1 R25.1 R28.1 R29.1 STLINK1.4 STLINK1.6 STLINK1.9 STLINK1.10 U1.2 U1.3 U2.2 U2.14 U5.2 U5.7 U5.8 U6.11 U6.12 U6.13 U6.14 U6.15 U6.16 U6.17 U6.29 U6.38 U6.39 U6.40 U6.41 U8.5 U9.2 U10.1 U10.8 U11.3 U12.5

## Polygon pours and split planes (outlines as drawn)
no net on (GND) (split plane): 177.29,25.91 25.91,25.91 25.91,126.49 177.29,126.49
no net on (PWR) (split plane): 177.29,25.91 25.91,25.91 25.91,126.49 177.29,126.49